# Altium PCB PCB_relay.PcbDoc
Units mm, origin at the board's own origin, x right, y up, seen from the top; angles counter-clockwise.
Board outline 46.86 x 50.16 mm, 2 copper layers (Top Layer, Bottom Layer); 11 components, 12 nets, 34 pads, 0 vias.
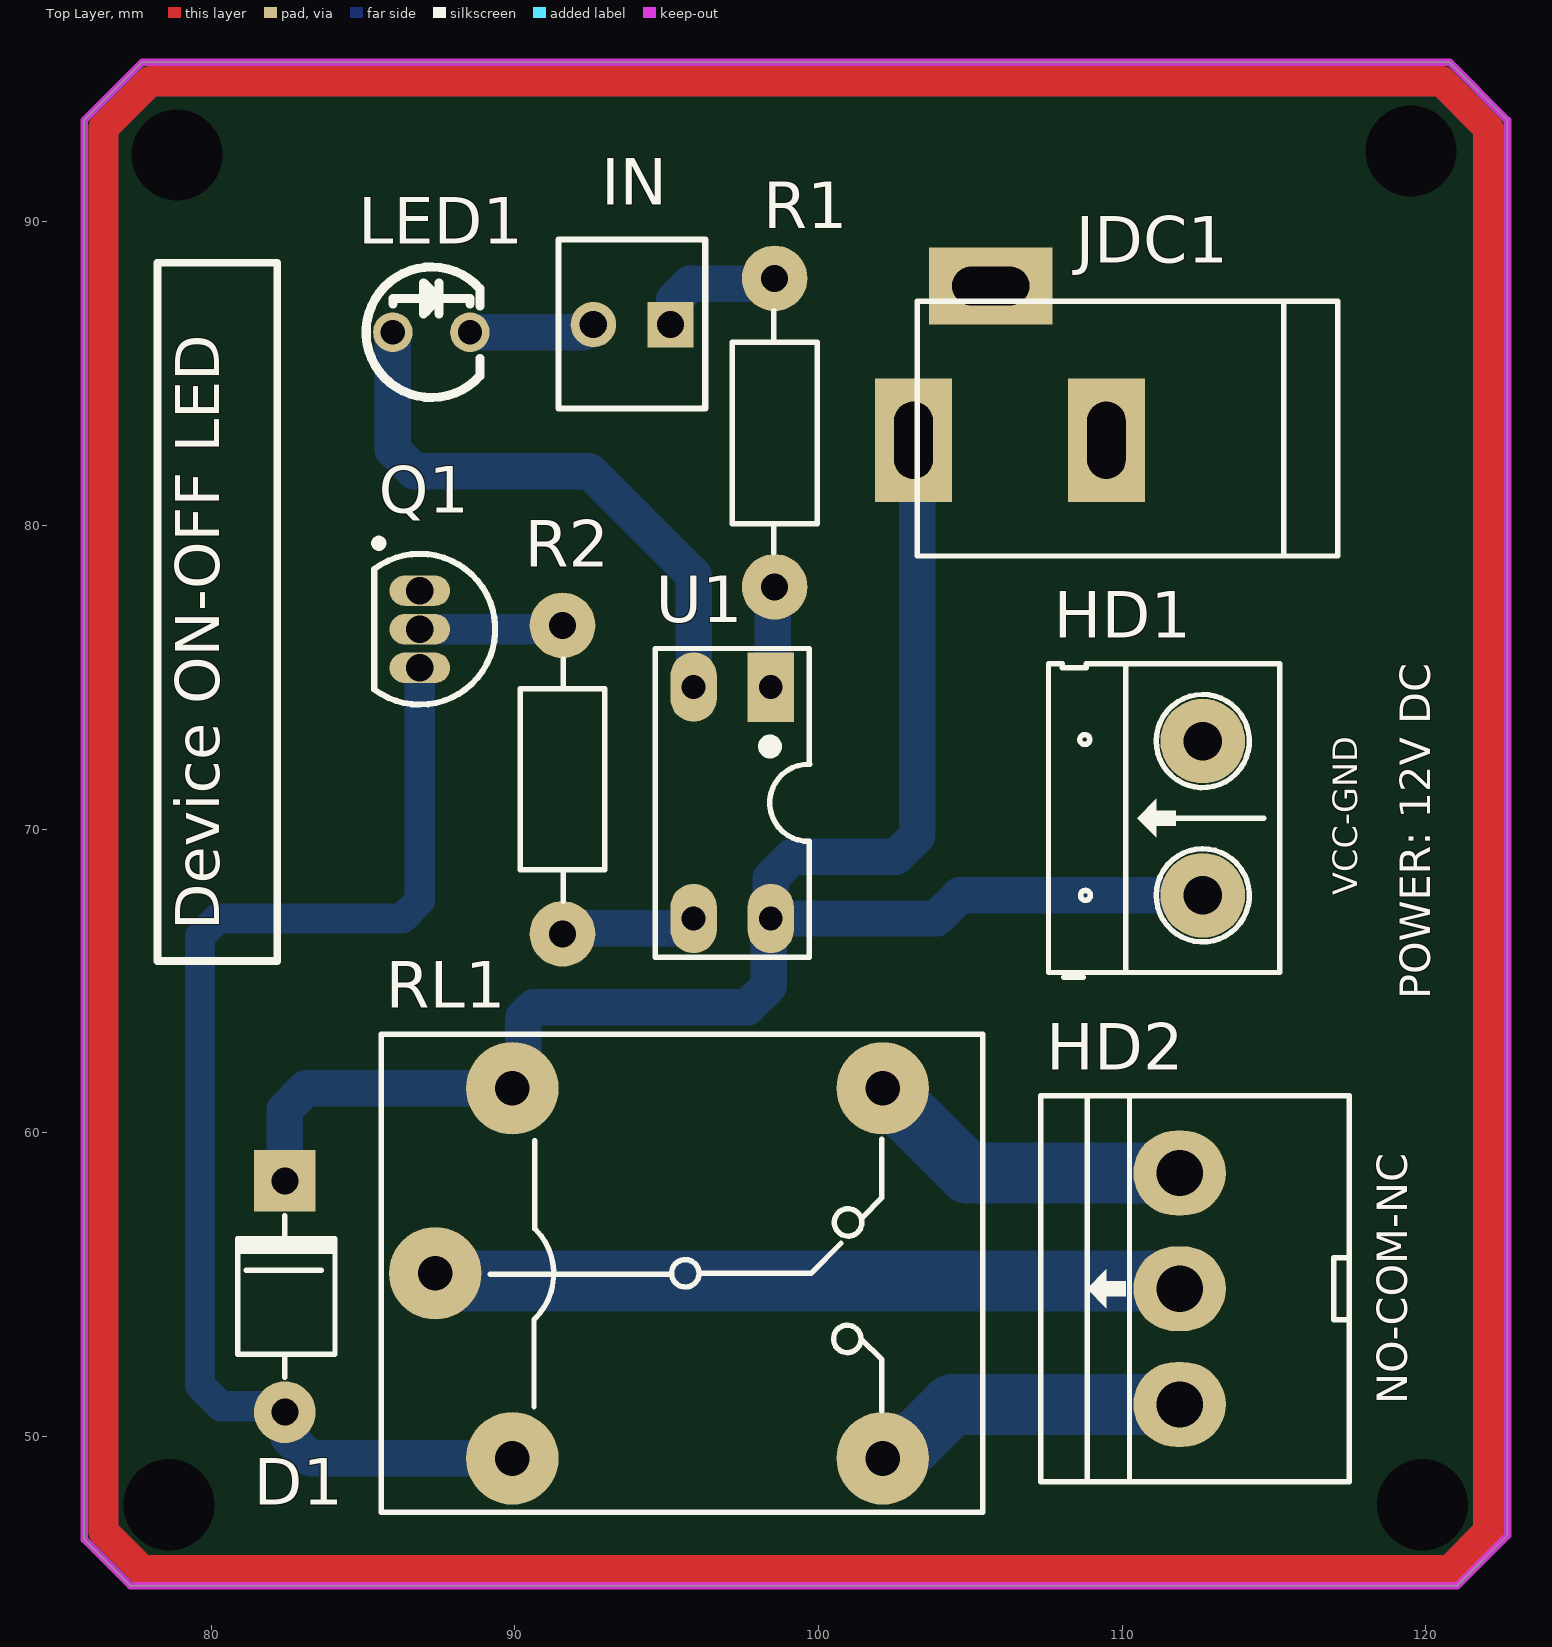
[diagram p0: Top Layer view]
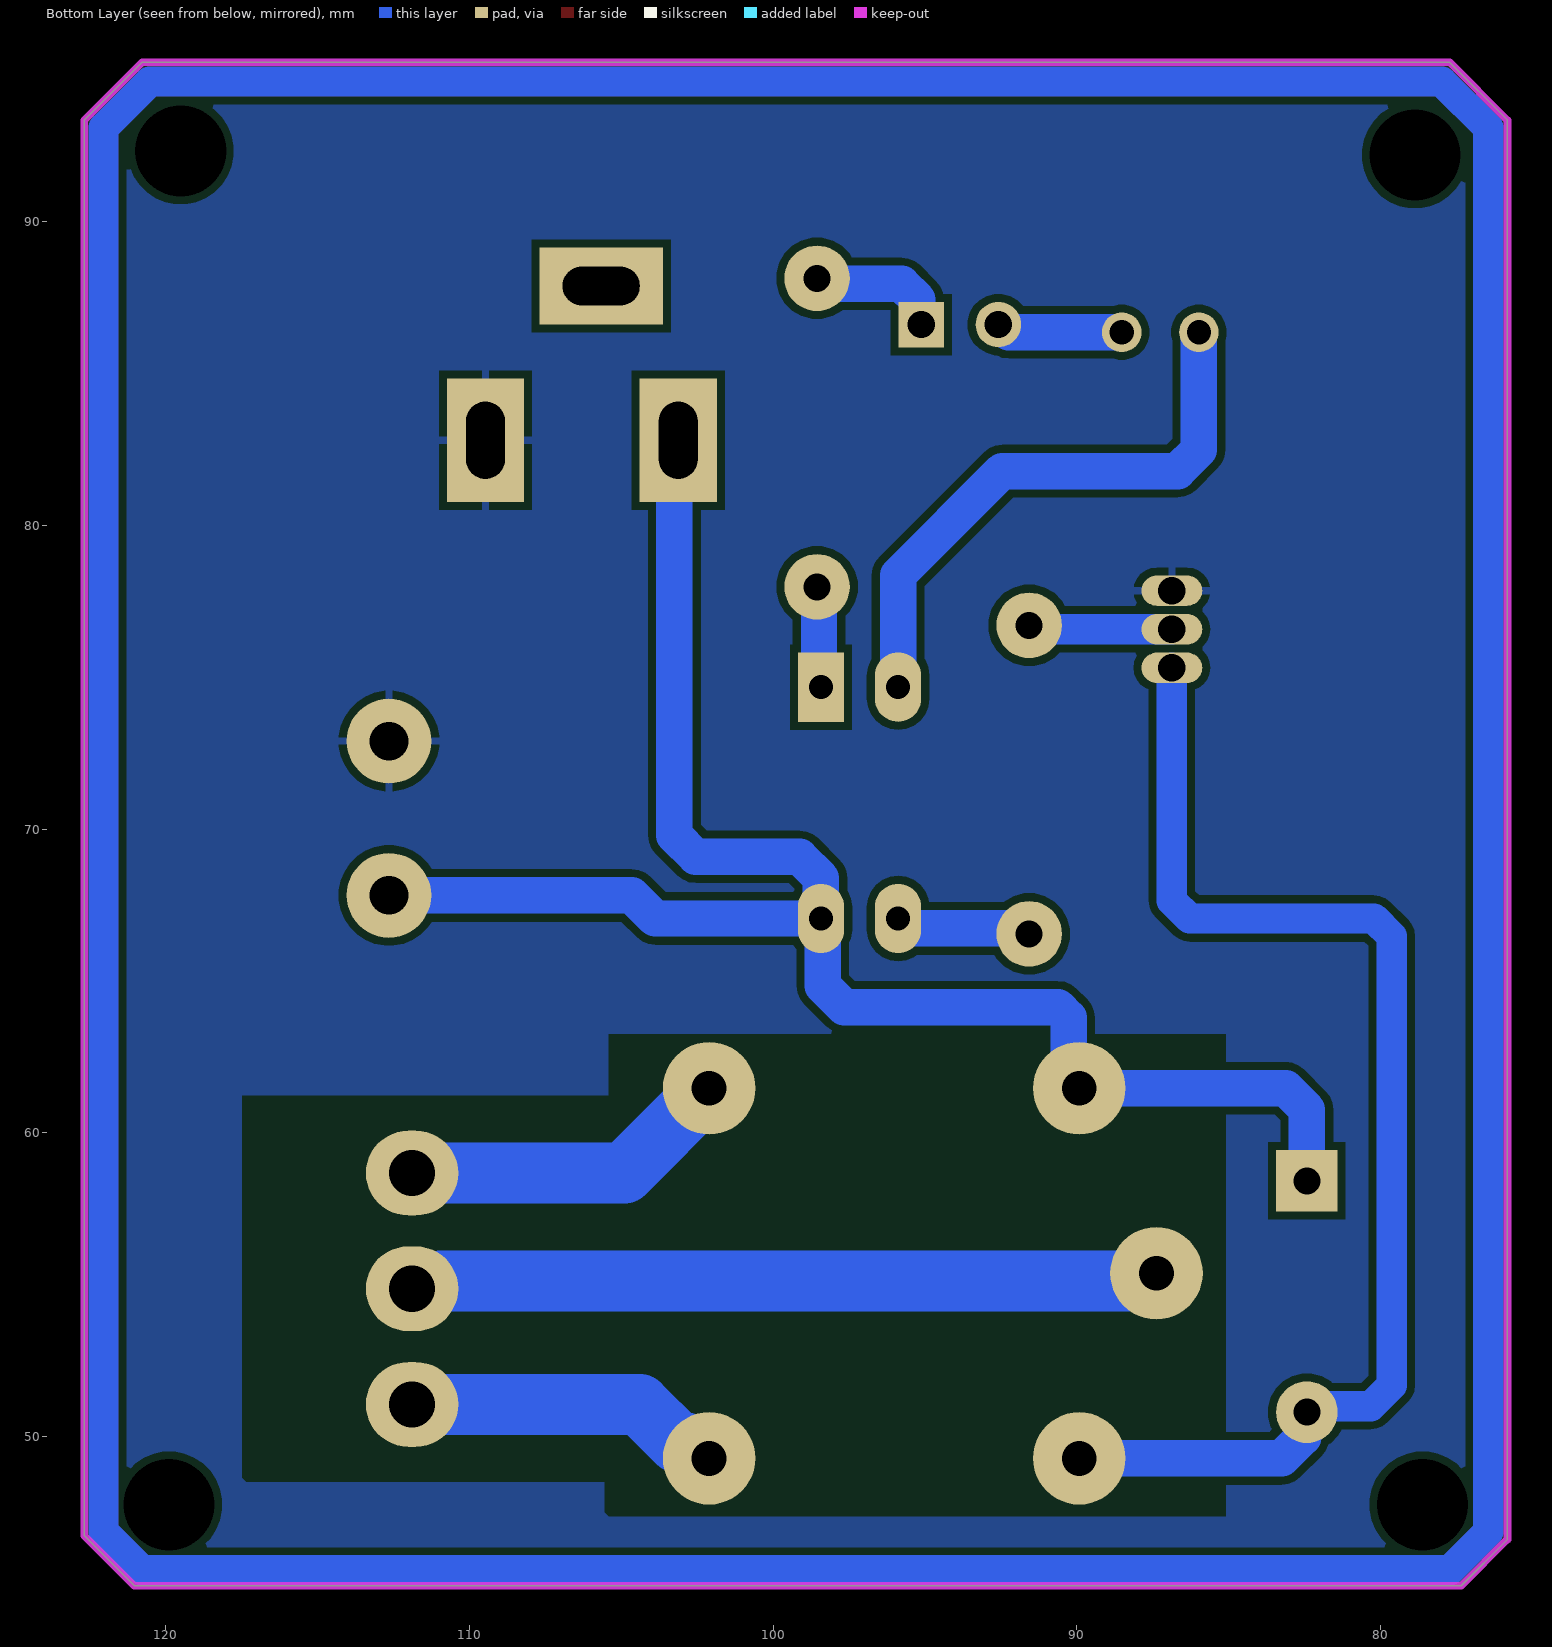
[diagram p1: Bottom Layer view, seen from below]
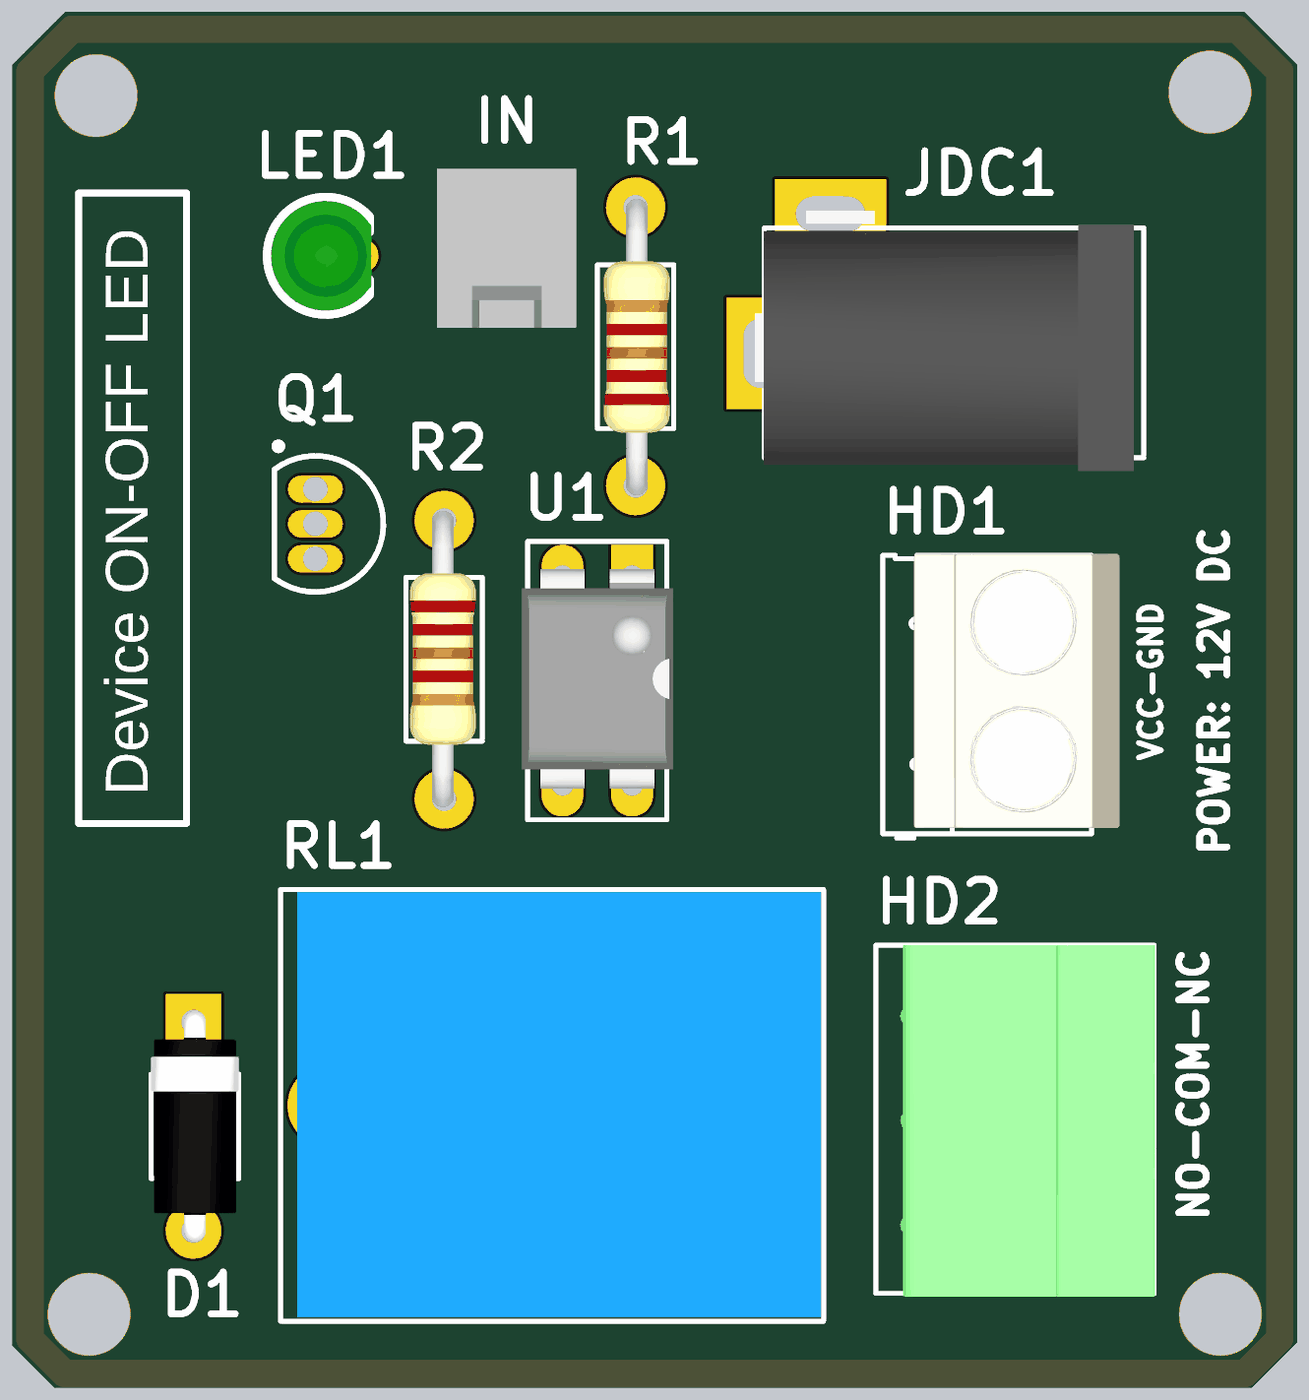
[diagram p2: 3D render of the assembled board from above, using the file's embedded part models]

## Layer stack, top to bottom
Top Solder: solder mask 0.0102, Solder Resist, Dk 3.5
Top Layer: signal copper 0.0356
Dielectric 1: dielectric 0.32, FR-4, Dk 4.8
Bottom Layer: signal copper 0.0356
Bottom Solder: solder mask 0.0102, Solder Resist, Dk 3.5

## Board outline
75.819,46.609 77.343,45.085 121.031,45.085 122.682,46.736 122.682,93.345 120.777,95.25 77.724,95.25 75.819,93.345

## Design rules (kind name [scope] priority, off if disabled: settings)
Clearance [All] p1: gap=0.254 ignorepadtopadclearanceinfootprint=FALSE except(0: Arc-Hole Track-Hole SMDPad-Hole THPad-Hole Via-Hole Fill-Hole Poly-Hole Region-Hole Text-Hole)
PolygonConnect [All] p1: connectstyle=Relief reliefconductorwidth=0.254 reliefentries=4 polygonreliefangle="90 Angle" airgapwidth=0.254
RoomDefinition Schematic_relay [InComponentClass('Schematic_relay')] p1: confinementstyle=ConfineIn formatcopy=TRUE lockcomponents=FALSE outline 178.943,26.924 272.034,26.924 272.034,49.784 178.943,49.784
RoutingVias [All] p1: holewidth=0.711 width=1.27 viastyle="Through Hole" minholewidth=0.711 minwidth=1.27 maxholewidth=0.711 maxwidth=1.27
SolderMaskExpansion [All] p1: expansion=0.102 istentingtop=FALSE
Width [All] p1: maxlimit=1 minlimit=1 preferedwidth=1 minimp=50.000000 maximp=50.000000 favimp=50.000000
30 further rules are at their usual default settings.

## Components (designator, comment, footprint, x,y, rotation, side; value= is the part's Value field where it differs from the comment)
D1 "Diode" DIO-1A-SMALL 82.423,49.53 r270 top value=1N5007
HD1 "Header 2" HED2 112.649,67.818 r90 top
HD2 "Header 3" HED3B 111.887,51.054 r90 top
IN "Header2" HDR2 95.123,86.614 r180 top
JDC1 "Jack DC" DC-IN 106.299,85.344 r180 top value="Jac DC"
LED1 "LED_G_3" LED3G 85.979,86.36 r0 top value=Green
Q1 "2N3904" TO-92A 86.868,76.581 r180 top
R1 "RESISTOR" "RES 1/2W" 98.552,88.138 r270 top value=470
R2 "RESISTOR" "RES 1/2W" 91.567,66.548 r90 top value=470
RL1 "Relay 10A/12V" "RELAY 5" 95.631,55.372 r0 top value="Relay SPDT, 10A, 12V"
U1 "PC817" DIP4 98.425,74.676 r180 top

## Footprints (in the part's own frame and the unit in brackets; to place one, negate y for a bottom-side part, rotate by r counter-clockwise, add the part's x,y. Pads: shape width x height; smd on the part's side, far side on the other; paste and mask are expansions set on the pad)
DC-IN [mil]
  rect 100x160 hole 50 slot 100 at 90 deg: 1(125,100) 2(-125,100)
  rect 160x100 hole 50 slot 100 at 0 deg: 3(25,-100)
  silkscreen extent -425,-80 120,250, body extent -410,-105 134,269, height 434
DIO-1A-SMALL [mil] "Diode 1A, W 100mil, L 350mil"
  round 80 hole 35: 1(-50,0)
  rect 80x80 hole 35: 2(-350,0)
  silkscreen extent -305,-61 -95,65, body extent -366,-61 -34,65, height 122
DIP4 [mil]
  rect 60x90 hole 31: 1(0,0)
  oval 60x90 hole 31: 2(100,0) 3(100,300) 4(0,300)
  silkscreen extent -50,-50 150,350, body extent -59,-10 159,305, height 170
HDR2 [mm] "Connector; Header; 2 Position"
  rect 1.5x1.5 hole 0.9: 1(0,0)
  round 1.5 hole 0.9: 2(2.54,0)
  silkscreen extent -1.14,-2.79 3.68,2.77, body extent -1.27,-2.92 3.81,2.88, height 11.72
HED2 [mil] "Header 2, 2 pin, hight 300mil, Pin to Pin 200, Colour Green"
  round 110 hole 50: 1(0,0) 2(200,0)
  silkscreen extent -106,-100 300,200, body extent -92,-140 302,155, height 394
HED3B [mil] "Header 3, 3 pin, hight 300mil, Pin to Pin 150, Colour White"
  oval 110x120 hole 60: 1(0,0) 2(150,0) 3(300,0)
  silkscreen extent -100,-220 400,180, body extent -104,-221 400,145, height 285
LED3G [mm]
  round 1.3 hole 0.8: 1(0,0) 2(2.54,0)
  silkscreen extent -0.88,-2.15 2.87,2.15, body extent -0.73,-2 2.94,2, height 4.6
"RELAY 5" [mil] "Reley DPDT, 8 pin, 1A, W400mil, L800mil,H 300mil"
  round 120 hole 45: 1(-325,0) 2(255,240) 3(255,-240) 4(-225,-240) 5(-225,240)
  silkscreen extent -395,-310 385,310, body extent -371,-304 381,306, height 602
"RES 1/2W" [mil]
  round 85 hole 35: 1(0,0) 2(400,0)
  silkscreen extent 42,-55 356,55, body extent -12,-45 414,49, height 91
TO-92A [mm] "TO, Flat Index; 3 In-Line, Axial Leads; Body Dia. 4.5mm; Leads 0.51 x 0.48 mm (max)"
  oval 2x1 hole 0.9: 1(0,-1.27) 2(0,0) 3(0,1.27)
  silkscreen extent -2.48,-2.95 1.5,2.48, body extent -2.48,-2.5 1.5,2.5, height 6.86

## Part data
D1: "Default Diode", Code - JEDEC=DO-214-AB, Published=8-Jun-2000, Publisher="Altium Limited", Revision="July-2002: Re-released for DXP Platform."
HD1: library part Hed2, "Header 2 (Green)"
HD2: library part Hed3, "Header 3 (Green)"
IN: "Header IDC, 2 x 1 Pin Vertical 2.54mm Pitch (Non-Boxed, Male)", Manufacturer="W¨¹rth Elektronik eiSos GmbH", partNo=613002143121, ComponentLink1 Description=Manufacturer, ComponentLink1URL=http://www.we-online.com, ComponentLink2 Description=Datasheet, ComponentLink2URL=http://katalog.we-online.de/em/datasheet/6130xx143121.pdf, Created by="Karrer Zheng", Created Date="29 March 2013", NoPins=02
JDC1: "Jack DC input"
LED1: library part LED_GREEN_3MM, "LED Green 3mm", ComponentLink1Description=Datasheet, ComponentLink1URL="D:\Dropbox\Datasheets\Opto and Illumination\LEDs\SMD LED.pdf", Unit Price=0.0476
Q1: "NPN General Purpose Amplifier", ComponentLink1Description="Manufacturer Link", ComponentLink1URL=http://www.fairchildsemi.com/, ComponentLink2Description=Datasheet, ComponentLink2URL=http://www.fairchildsemi.com/ds/2N%2F2N3904.pdf, DatasheetVersion=1997, LatestRevisionDate=15-Jan-2003, LatestRevisionNote="PCB Footprint 'BCY-W3/D4.7' replaced", PackageDescription="TO, Flat Index; 3 In-Line, Axial Leads; Body Dia. 4.5mm; Leads 0.51 x 0.48 mm (max)", PackageReference=TO-92A, PackageVersion=Sep-1998, Published=8-Jun-2000, Publisher="Altium Limited"
R1 R2: "Resistor"
RL1: library part "Relay 5", "Relay SPDT,10A - 12VDC 5 Pin"
U1: "Single Opto"

## Free pads (board coordinates)
  round 1.524 hole 3: 2(78.867,92.202) 3(119.507,92.329) 4(119.888,47.752) 5(78.613,47.752)

## Nets (pads, with @x,y where several pads share a name; then routed paths per layer and width w, separated by ;. In a path a pad name is that pad's centre, name@x,y a point inside that pad or via, vN(x,y) a via of type N, cw(c..) or ccw(c..) an arc to the next point about the centre after c; other vN are vias at no path point)
+12V-PCB2: D1.2 HD1.1 JDC1.1 RL1.5 U1.4 | length 57.7
  Bottom Layer w1.2: D1.2 82.423,60.765 83.126,61.468 RL1.5 90.27,61.822 90.27,63.786 90.619,64.135 97.66,64.135 98.363,64.838 98.363,66.994 U1.4 ; JDC1.1 103.251,82.677 103.251,69.791 102.548,69.088 99.128,69.088 98.425,68.385 U1.4 ; HD1.1 104.648,67.818 103.886,67.056 U1.4
COM: HD2.2 RL1.1 | length 25.4
  Top Layer w1: RL1.1 RL1.1@87.63,55.118 ; HD2.2@111.633,55.118 HD2.2
  Bottom Layer w2: RL1.1 87.577,55.171 88.318,55.171 88.371,55.118 110.945,55.118 111.047,55.016 111.735,55.016 HD2.2
GND-PCB2: IN.1 R1.1 | length 4.5
  Bottom Layer w1.2: IN.1 95.25,86.741 95.25,87.435 95.769,87.955 98.369,87.955 R1.1
GND-PCB2.1: HD1.2 JDC1.2 Q1.1
NetD1_1: D1.1 Q1.3 RL1.4 | length 41.9
  Bottom Layer w1: D1.1 82.226,50.997 80.321,50.997 79.629,51.689 79.629,66.47 80.215,67.056 86.282,67.056 86.868,67.642 Q1.3
  Bottom Layer w1.2: D1.1 82.55,50.673 82.55,49.979 83.253,49.276 RL1.4
NetHD2_1: HD2.1 RL1.3 | length 11.1
  Top Layer w1: RL1.3 RL1.3@102.662,49.276
  Bottom Layer w2: RL1.3 102.392,49.276 102.916,49.8 103.14,49.8 104.394,51.054 HD2.1
NetHD2_3: HD2.3 RL1.2 | length 10.9
  Bottom Layer w2: RL1.2 104.902,58.674 HD2.3
NetIN_2: IN.2 LED1.2 | length 4.2
  Bottom Layer w1.2: LED1.2 92.248,86.36 92.502,86.614 IN.2
NetLED1_1: LED1.1 U1.2 | length 19.2
  Bottom Layer w1.2: LED1.1 85.979,82.491 86.682,81.788 92.456,81.788 95.885,78.359 U1.2
NetQ1_2: Q1.2 R2.2 | length 4.8
  Bottom Layer w1: Q1.2 91.44,76.581 R2.2
NetR1_2: R1.2 U1.1 | length 3.4
  Bottom Layer w1.2: U1.1 98.489,74.739 98.489,77.915 R1.2
NetR2_1: R2.1 U1.3 | length 4.6
  Bottom Layer w1.2: R2.1 91.75,66.731 95.735,66.731 95.885,66.881 U1.3
pads on no net: JDC1.3
copper on no net: | length 371.9
  Top Layer w1: 76.454,46.863 76.454,93.091 77.986,94.623 120.515,94.623 122.055,93.083 122.055,46.871 120.777,45.593 77.724,45.593 76.454,46.863
  Bottom Layer w1: 76.454,46.863 77.724,45.593 120.777,45.593 122.047,46.863 122.047,93.091 120.523,94.615 120.229,94.615 115.443,94.615 79.232,94.615 77.978,94.615 76.454,93.091 76.454,55.753 76.454,54.184 76.454,46.863

## Polygon pours and split planes (outlines as drawn)
GND-PCB2.1 on Bottom Layer "NONET_L-01_P-001" (solid, pour order 0): 78.232,94.107 77.089,92.964 76.962,92.964 76.962,47.117 77.978,46.101 120.65,46.101 121.666,47.117 121.666,92.964 120.269,94.361 119.507,94.361

## Keep-outs
Keep-Out Layer:
  the board outline again, w0.254

## Other copper
Bottom Layer:
  pour cut-out: 85.09,47.371 105.41,47.371 105.537,47.498 105.537,48.514 117.348,48.514 117.475,48.641 117.475,61.214 105.41,61.214 105.41,63.246 85.09,63.246

## Silkscreen, mask and mechanical layers (free items; w line width, h text height)
Top Overlay:
  lines w0.254: 78.232,65.659 78.232,88.646 82.169,88.646 82.169,65.659 78.232,65.659
  text "VCC-GND" at 117.729,67.818 h0.8 r90
  text "Device ON-OFF LED" at 80.745,66.675 h2.5 r90
  text "POWER: 12V DC" at 120.142,64.389 h1 r90
  text "NO-COM-NC" at 119.38,51.054 h1 r90
Bottom Solder:
  lines w2: 87.63,55.118 111.633,55.118 ; 102.108,61.468 104.902,58.674 111.887,58.674 ; 102.662,49.276 104.44,51.054 111.887,51.054